# Altium PCB OptoGrid_uLEDArray_V0.05.pcbdoc (part 1 of 2)
Units mil, origin at the board's own origin, x right, y up, seen from the top; angles counter-clockwise.
Board outline 861.98 x 813.48 mil, 2 copper layers (Top Layer, Bottom Layer); 65 components, 16 nets, 148 pads, 64 vias.
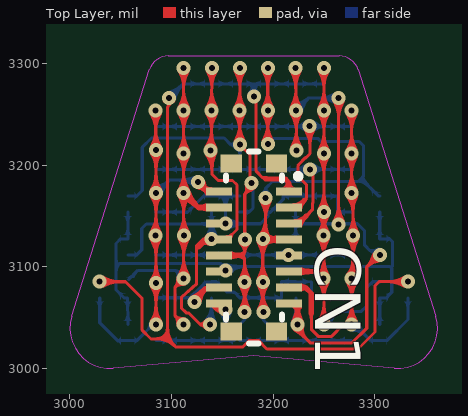
[diagram p0: Top Layer view]
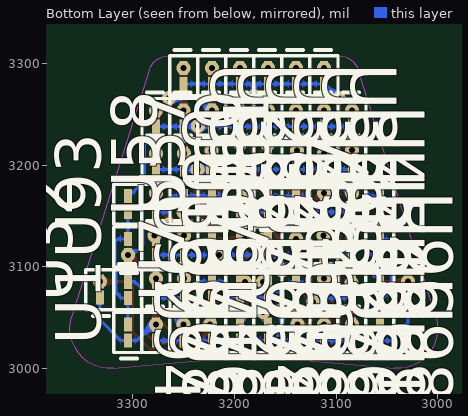
[diagram p1: Bottom Layer view, seen from below]

## Layer stack, top to bottom
Top Layer: signal copper (thickness not stored)
Dielectric: dielectric 12.6, FR-4, Dk 4.8
Bottom Layer: signal copper (thickness not stored)

## Board outline
3611.98,2750 2750,2750 2750,3563.48 3611.98,3563.48

## Design rules (kind name [scope] priority, off if disabled: settings)
BoardOutlineClearance Default [All] p0: genericclearance=10 ignorepadtopadclearanceinfootprint=FALSE except(0: Region-CutoutEdge Arc-SplitContinuation Track-SplitContinuation SMDPad-SplitContinuation THPad-SplitContinuation Via-SplitContinuation Fill-SplitContinuation Poly-SplitContinuation Region-SplitContinuation Text-SplitContinuation; 3: Track-OutlineEdge SMDPad-OutlineEdge THPad-OutlineEdge Via-OutlineEdge Fill-OutlineEdge Region-OutlineEdge Poly-OutlineEdge Text-OutlineEdge Track-CutoutEdge SMDPad-CutoutEdge THPad-CutoutEdge Via-CutoutEdge Fill-CutoutEdge)
Clearance Default [(InNet('Y6') OR InNet('X3') OR InNet('X4') OR InNet('X8') OR InNet('X1') OR InNet('Y3') OR InNet('Y1') OR InNet('Y5') OR InNet('Y7') OR InNet('Y8') OR InNet('X7') OR InNet('X2') OR InNet('Y2') OR InNet('Y4') OR InNet('X6') OR InNet('X5'))] p1: gap=7 ignorepadtopadclearanceinfootprint=FALSE except(0: Region-Region; 3: Track-Track Track-SMDPad SMDPad-SMDPad Track-THPad SMDPad-THPad THPad-THPad Track-Via SMDPad-Via THPad-Via Via-Via Track-Fill SMDPad-Fill THPad-Fill Via-Fill Fill-Fill Track-Region SMDPad-Region THPad-Region Via-Region Fill-Region Track-Poly SMDPad-Poly THPad-Poly Via-Poly Fill-Poly Region-Poly Poly-Poly Track-Text SMDPad-Text THPad-Text Via-Text Fill-Text Region-Text Poly-Text Text-Text Track-Sheet SMDPad-Sheet THPad-Sheet Via-Sheet Fill-Sheet Region-Sheet Poly-Sheet Text-Sheet Track-Hole SMDPad-Hole THPad-Hole Via-Hole Fill-Hole Region-Hole Poly-Hole Text-Hole Sheet-Hole)
DiffPairsRouting differentialPair [All] p1: maxuncoupledlength=10 minlimit=6 maxlimit=6 mostfreqgap=6 toplayer_minwidth=5 toplayer_prefwidth=10 toplayer_maxwidth=100 bottomlayer_minwidth=5 bottomlayer_prefwidth=10 bottomlayer_maxwidth=100
PasteMaskExpansion Common [All] p1: expansion=0
PlaneConnect Default [All] p1: planeconnectstyle=Relief reliefexpansion=20 reliefentries=4 reliefconductorwidth=0 reliefairgap=10
PolygonConnect Default [All] p1: connectstyle=Relief reliefentries=4 reliefconductorwidth=0 polygonreliefangle="90 Angle" airgapwidth=10
RoutingVias Default [All] p1: viastyle="Through Hole" holewidth=5.9 minholewidth=5.9 maxholewidth=2362 width=13.8 minwidth=13.8 maxwidth=3938
SolderMaskExpansion Common [All] p1: useseparateexpansions=TRUE expansion=2 expansionbottom=2
Width Default [All] p1: maxlimit=1000 minlimit=3 preferedwidth=5

## Components (designator, comment, footprint, x,y, rotation, side; value= is the part's Value field where it differs from the comment)
CN1 "YXT-BB10-16P-02" CONN-SMD_YXT-BB10-16P-02 3180.97,3118.89 r270 top locked
U1 "BLUE LED" BLUE_LED_KINGBRIGHT_0201 3304.97,3035.09 r90 bottom locked
U29 "BLUE LED" BLUE_LED_KINGBRIGHT_0201 3194.75,3287.89 r270 bottom locked
U30 "BLUE LED" BLUE_LED_KINGBRIGHT_0201 3222.23,3287.89 r270 bottom locked
U31 "BLUE LED" BLUE_LED_KINGBRIGHT_0201 3249.97,3287.89 r270 bottom locked
U32 "BLUE LED" BLUE_LED_KINGBRIGHT_0201 3332.57,3077.29 r90 bottom locked
U33 "BLUE LED" BLUE_LED_KINGBRIGHT_0201 3167.19,3287.89 r270 bottom locked
U34 "BLUE LED" BLUE_LED_KINGBRIGHT_0201 3139.64,3287.89 r270 bottom locked
U35 "BLUE LED" BLUE_LED_KINGBRIGHT_0201 3111.97,3287.89 r270 bottom locked
U36 "BLUE LED" BLUE_LED_KINGBRIGHT_0201 3029.37,3077.29 r90 bottom locked
U38 "BLUE LED" BLUE_LED_KINGBRIGHT_0201 3194.77,3245.89 r270 bottom locked
U39 "BLUE LED" BLUE_LED_KINGBRIGHT_0201 3222.37,3245.89 r270 bottom locked
U40 "BLUE LED" BLUE_LED_KINGBRIGHT_0201 3249.97,3245.89 r270 bottom locked
U41 "BLUE LED" BLUE_LED_KINGBRIGHT_0201 3277.37,3245.89 r270 bottom locked
U42 "BLUE LED" BLUE_LED_KINGBRIGHT_0201 3166.97,3245.89 r270 bottom locked
U43 "BLUE LED" BLUE_LED_KINGBRIGHT_0201 3139.47,3245.89 r270 bottom locked
U44 "BLUE LED" BLUE_LED_KINGBRIGHT_0201 3111.97,3245.89 r270 bottom locked
U45 "BLUE LED" BLUE_LED_KINGBRIGHT_0201 3084.47,3245.89 r270 bottom locked
U47 "BLUE LED" BLUE_LED_KINGBRIGHT_0201 3194.46,3203.68 r270 bottom locked
U48 "BLUE LED" BLUE_LED_KINGBRIGHT_0201 3223.98,3203.52 r270 bottom locked
U49 "BLUE LED" BLUE_LED_KINGBRIGHT_0201 3249.86,3203.68 r270 bottom locked
U50 "BLUE LED" BLUE_LED_KINGBRIGHT_0201 3277.37,3203.69 r270 bottom locked
U51 "BLUE LED" BLUE_LED_KINGBRIGHT_0201 3167.17,3203.69 r270 bottom locked
U52 "BLUE LED" BLUE_LED_KINGBRIGHT_0201 3139.46,3203.68 r270 bottom locked
U53 "BLUE LED" BLUE_LED_KINGBRIGHT_0201 3111.97,3203.69 r270 bottom locked
U54 "BLUE LED" BLUE_LED_KINGBRIGHT_0201 3084.57,3203.69 r270 bottom locked
U56 "BLUE LED" BLUE_LED_KINGBRIGHT_0201 3194.77,3161.49 r270 bottom locked
U57 "BLUE LED" BLUE_LED_KINGBRIGHT_0201 3222.17,3161.69 r90 bottom locked
U58 "BLUE LED" BLUE_LED_KINGBRIGHT_0201 3249.77,3161.49 r90 bottom locked
U59 "BLUE LED" BLUE_LED_KINGBRIGHT_0201 3277.37,3161.49 r270 bottom locked
U60 "BLUE LED" BLUE_LED_KINGBRIGHT_0201 3167.17,3161.49 r90 bottom locked
U61 "BLUE LED" BLUE_LED_KINGBRIGHT_0201 3139.57,3161.49 r90 bottom locked
U62 "BLUE LED" BLUE_LED_KINGBRIGHT_0201 3111.97,3161.49 r270 bottom locked
U63 "BLUE LED" BLUE_LED_KINGBRIGHT_0201 3084.46,3161.68 r270 bottom locked
U66 "BLUE LED" BLUE_LED_KINGBRIGHT_0201 3084.37,3119.42 r270 bottom locked
U67 "BLUE LED" BLUE_LED_KINGBRIGHT_0201 3112.17,3119.49 r270 bottom locked
U68 "BLUE LED" BLUE_LED_KINGBRIGHT_0201 3139.57,3119.49 r270 bottom locked
U69 "BLUE LED" BLUE_LED_KINGBRIGHT_0201 3167.17,3119.29 r270 bottom locked
U70 "BLUE LED" BLUE_LED_KINGBRIGHT_0201 3277.37,3119.49 r270 bottom locked
U71 "BLUE LED" BLUE_LED_KINGBRIGHT_0201 3249.77,3119.49 r270 bottom locked
U72 "BLUE LED" BLUE_LED_KINGBRIGHT_0201 3222.17,3119.49 r270 bottom locked
U73 "BLUE LED" BLUE_LED_KINGBRIGHT_0201 3194.77,3119.49 r270 bottom locked
U74 "BLUE LED" BLUE_LED_KINGBRIGHT_0201 3194.77,3077.29 r270 bottom locked
U75 "BLUE LED" BLUE_LED_KINGBRIGHT_0201 3222.37,3077.29 r90 bottom locked
U76 "BLUE LED" BLUE_LED_KINGBRIGHT_0201 3249.77,3077.29 r270 bottom locked
U77 "BLUE LED" BLUE_LED_KINGBRIGHT_0201 3277.37,3077.29 r270 bottom locked
U78 "BLUE LED" BLUE_LED_KINGBRIGHT_0201 3167.17,3077.29 r270 bottom locked
U79 "BLUE LED" BLUE_LED_KINGBRIGHT_0201 3139.57,3077.29 r90 bottom locked
U80 "BLUE LED" BLUE_LED_KINGBRIGHT_0201 3111.97,3077.29 r270 bottom locked
U81 "BLUE LED" BLUE_LED_KINGBRIGHT_0201 3084.57,3077.29 r270 bottom locked
U83 "BLUE LED" BLUE_LED_KINGBRIGHT_0201 3194.77,3035.29 r270 bottom locked
U84 "BLUE LED" BLUE_LED_KINGBRIGHT_0201 3222.17,3035.29 r270 bottom locked
U85 "BLUE LED" BLUE_LED_KINGBRIGHT_0201 3249.97,3035.29 r270 bottom locked
U86 "BLUE LED" BLUE_LED_KINGBRIGHT_0201 3277.37,3035.29 r270 bottom locked
U87 "BLUE LED" BLUE_LED_KINGBRIGHT_0201 3167.17,3035.29 r270 bottom locked
U88 "BLUE LED" BLUE_LED_KINGBRIGHT_0201 3139.57,3035.29 r270 bottom locked
U89 "BLUE LED" BLUE_LED_KINGBRIGHT_0201 3111.97,3035.29 r270 bottom locked
U90 "BLUE LED" BLUE_LED_KINGBRIGHT_0201 3084.57,3035.29 r270 bottom locked
U92 "BLUE LED" BLUE_LED_KINGBRIGHT_0201 3304.97,3161.49 r270 bottom locked
U93 "BLUE LED" BLUE_LED_KINGBRIGHT_0201 3304.97,3119.49 r90 bottom locked
U94 "BLUE LED" BLUE_LED_KINGBRIGHT_0201 3304.97,3077.29 r270 bottom locked
U96 "BLUE LED" BLUE_LED_KINGBRIGHT_0201 3056.97,3161.49 r270 bottom locked
U97 "BLUE LED" BLUE_LED_KINGBRIGHT_0201 3056.97,3119.49 r90 bottom locked
U98 "BLUE LED" BLUE_LED_KINGBRIGHT_0201 3056.77,3077.29 r270 bottom locked
U99 "BLUE LED" BLUE_LED_KINGBRIGHT_0201 3056.97,3035.09 r90 bottom locked

## Footprints (in the part's own frame and the unit in brackets; to place one, negate y for a bottom-side part, rotate by r counter-clockwise, add the part's x,y. Pads: shape width x height; smd on the part's side, far side on the other; paste and mask are expansions set on the pad)
BLUE_LED_KINGBRIGHT_0201 [mm]
  rect 0.35x0.2 smd: 1(-0.2,0) 2(0.2,0)
  silkscreen extent -0.65,-0.35 0.5,0.35
CONN-SMD_YXT-BB10-16P-02 [mm]
  rect 0.2x0.65 smd: 1(-1.4,0.875) 2(-1.4,-0.875) 3(-1,0.875) 4(-1,-0.875) 5(-0.6,0.875) 6(-0.6,-0.875) 7(-0.2,0.875) 8(-0.2,-0.875) 9(0.2,0.875) 10(0.2,-0.875) 11(0.6,0.875) 12(0.6,-0.875) 13(1,0.875) 14(1,-0.875) 15(1.4,0.875) 16(1.4,-0.875)
  rect 0.45x0.53 smd: 17(-2.095,0.565) 18(-2.095,-0.565) 19(2.095,0.565) 20(2.095,-0.565)
  silkscreen extent -2.4,-0.7 2.4,1.17

## Via types
v1: diameter 13.78, hole 5.91, Top Layer to Bottom Layer, 64 vias

## Nets (pads, with @x,y where several pads share a name; then routed paths per layer and width w, separated by ;. In a path a pad name is that pad's centre, name@x,y a point inside that pad or via, vN(x,y) a via of type N, cw(c..) or ccw(c..) an arc to the next point about the centre after c; other vN are vias at no path point)
X1: CN1.2 U36.1 U45.1 U54.1 U63.1 U66.1 U81.1 U90.1 U99.1 | length 383.9
  Top Layer w3: v1(3084.47,3253.76) 3084.49,3214.69 3084.73,3214.45 v1(3084.75,3083.74) 3084.73,3043.34 v1(3084.57,3043.16)
  Top Layer w5: v1(3126.16,3183.15) 3135.31,3174 CN1.2@3146.52,3174
  Bottom Layer w3: U36.1@3029.37,3069.42 3029.37,3044.69 3046.97,3027.09 U99.1@3056.97,3027.22 3065.9,3027.22 3081.84,3043.16 v1(3084.57,3043.16) ; U66.1@3084.37,3127.29 v1(3084.37,3130.49) ; U63.1@3084.37,3172.69 U63.1@3084.47,3169.59 ; U81.1@3084.57,3085.16 3084.75,3084.98 v1(3084.75,3083.74) ; v1(3084.57,3172.69) 3098.05,3185.21 3124.1,3185.21 v1(3126.16,3183.15)
  other v1: 3084.57,3214.69
X2: CN1.4 U35.1 U44.1 U53.1 U62.1 U67.1 U80.1 U89.1 U98.1 | length 370.8
  Top Layer w3: v1(3111.97,3043.16) 3103.37,3051.79 3103.37,3079.69 v1(3111.97,3088.29) v1(3111.97,3172.49) v1(3111.97,3211.56) v1(3111.97,3253.76) v1(3111.97,3295.76)
  Top Layer w5: v1(3111.97,3172.49) 3126.2,3158.26 CN1.4@3146.52,3158.26
  Bottom Layer w3: U98.1@3057.91,3087.45 3066.86,3096.41 3104.11,3096.41 U80.1@3112.19,3088.33 ; U62.1@3111.77,3172.49 U62.1@3111.97,3169.36 ; U80.1@3111.97,3085.16 v1(3111.97,3088.29) ; U67.1@3112.17,3127.36 v1(3112.17,3130.49)
X3: CN1.8 U34.1 U43.1 U52.1 U61.1 U68.1 U79.1 U88.1 U97.1 | length 490.8
  Top Layer w3: v1(3137.92,3043.09) 3128.15,3043.09 3116.69,3054.55 3114.42,3054.55 3109.91,3059.06 3109.91,3069.98 3124.77,3083.22 3124.77,3120.89 3130.64,3126.76 3139.47,3126.76 CN1.8@3146.52,3126.76 ; v1(3138.4,3214.24) 3138.4,3214.06 3139.37,3213.09 v1(3139.47,3253.76) v1@3139.67,3295.79 ; v1@3139.87,3209.72 3139.87,3190.98 3146,3184.85 3160.11,3184.85 3164.41,3180.55 3164.41,3136.55 CN1.8@3155.98,3128.12
  Top Layer w5: 3126.17,3119.22 3126.62,3119.22 3130.75,3123.34 ; 3130.75,3124.24 3136.95,3124.24 CN1.8@3139.47,3126.76
  Bottom Layer w3: U97.1@3056.97,3111.62 3065.77,3111.62 3070.7,3116.54 3070.7,3137.55 3075.22,3142.08 3138.16,3142.08 3138.43,3142.35 ; v1(3137.92,3043.09) 3139.57,3044.74 U79.1@3139.57,3069.42 ; v1(3139.57,3127.36) U61.1@3139.57,3153.62
  other v1: 3139.63,3295.76
X4: CN1.10 U33.1 U42.1 U51.1 U60.1 U69.1 U78.1 U87.1 U96.1 | length 508.6
  Top Layer w3: CN1.10@3146.52,3111.01 3157.22,3111.01 3168.57,3111.01 3168.77,3111.01 ; v1(3167.19,3295.76) 3167.29,3295.67 v1(3167.29,3220.12) 3177.34,3210.07 3177.34,3183.86 v1(3178.7,3182.5) 3178.7,3178.01 3172.11,3171.42 v1(3172.11,3126.86) 3172.11,3114.34 3168.77,3111.01 ; v1(3172.05,3055.16) v1(3171.99,3084.83) 3171.99,3107.8 3168.77,3111.01
  Top Layer w5: CN1.10@3157.22,3111.01 3168.53,3111.05
  Bottom Layer w3: U96.1@3056.97,3169.36 3065.62,3169.39 3071.2,3174.97 3071.2,3217.42 3080.4,3226.62 3151.84,3226.62 3158.34,3220.12 v1(3167.29,3220.12) 3167.29,3211.68 U51.1@3167.17,3211.56 ; U87.1@3167.17,3043.16 3172.05,3048.04 v1(3172.05,3055.16) ; U60.1@3167.17,3153.62 3176.1,3153.62 3180.12,3157.64 3180.12,3181.08 v1(3178.7,3182.5)
  other v1: 3166.97,3253.76
X5: CN1.7 U29.1 U38.1 U47.1 U56.1 U73.1 U74.1 U83.1 U92.1 | length 497
  Top Layer w3: v1@3189.82,3126.48 v1(3189.82,3085.11) 3189.82,3055.76 v1(3190.42,3055.16) ; v1(3189.94,3127.29) 3192.73,3130.08 v1(3192.73,3167.44) ; v1(3194.73,3220.66) 3194.73,3253.76 v1@3194.73,3295.75
  Top Layer w5: v1@3188.44,3126.73 3188.7,3126.48 3189.82,3126.48 CN1.7@3214.88,3126.48
  Bottom Layer w3: v1(3190.42,3055.16) 3190.42,3047.55 U83.1@3194.77,3043.16 ; U56.1@3194.77,3169.36 3192.86,3167.44 v1(3192.73,3167.44) 3192.73,3177.24 3199.36,3183.88 3283.76,3183.88 3286.55,3186.67 ; v1(3194.73,3220.66) 3200.36,3226.29 3243.97,3226.29 3246.97,3223.29 3284.71,3223.29 3288.77,3219.23 3288.77,3188.89 3286.55,3186.67 ; U92.1@3304.97,3169.36 3303.86,3169.36 3286.55,3186.67
  other v1: 3194.77,3253.76 3194.75,3295.76
X6: CN1.15 U30.1 U39.1 U48.1 U57.1 U72.1 U75.1 U84.1 U93.1 | length 615.1
  Top Layer w3: v1@3222.27,3295.79 v1(3222.37,3253.76) ; v1(3222.37,3253.76) 3222.84,3253.29 v1(3222.84,3214.38) ; v1(3224.02,3043.09) 3224.02,3037.44 3236.44,3025.02 3277.69,3025.02 3292.17,3039.39 3292.17,3099.89 3303.87,3111.59 v1(3304.97,3111.62) ; v1@3224.02,3044.15 3224.02,3058.19 3224.02,3058.44 ; v1(3264.37,3265.89) 3264.57,3265.69 v1(3264.57,3141.49)
  Top Layer w5: CN1.15@3215.41,3063.77 3218.69,3063.77 3224.02,3058.44 ; v1@3224.02,3044.15 3224.01,3058.17 ; 3224.02,3058.19 CN1.15@3225.71,3059.87
  Bottom Layer w3: U72.1@3222.17,3127.36 3222.17,3141.49 ; U57.1@3222.17,3153.82 3222.17,3141.49 ; U75.1@3222.37,3069.42 3222.37,3044.74 v1(3224.02,3043.09) ; v1(3222.37,3253.76) 3234.5,3265.89 v1(3264.37,3265.89) ; v1(3304.97,3111.62) 3301.13,3115.46 3295.72,3115.46 3290.16,3121.01 3290.16,3135.21 3283.14,3142.23 3222.91,3142.23 3222.17,3141.49
  other v1: 3222.23,3295.76
X7: CN1.11 U31.1 U40.1 U49.1 U58.1 U71.1 U76.1 U85.1 U94.1 | length 378.9
  Top Layer w3: v1(3249.97,3043.16) v1(3249.97,3153.62) v1(3249.97,3253.76) v1(3249.97,3295.76)
  Top Layer w5: CN1.11@3215.41,3095.27 3242.79,3095.27 v1(3249.77,3088.29)
  Bottom Layer w3: U76.1@3249.77,3085.16 v1(3249.77,3088.29) ; U71.1@3249.77,3127.36 v1(3249.77,3130.49) ; v1(3249.97,3043.16) 3262.9,3056.09 3286.77,3056.09 3291.97,3061.29 3291.97,3079.09 3298.04,3085.16 U94.1@3304.97,3085.16
  other v1: 3249.86,3211.55
X8: CN1.13 U1.1 U32.1 U41.1 U50.1 U59.1 U70.1 U77.1 U86.1 | length 421.6
  Top Layer w3: 3237.57,3054.18 3237.57,3038.29 3244.37,3031.49 3257.67,3031.49 3269.37,3043.19 v1(3277.37,3043.16) v1(3277.37,3088.29) 3278.77,3089.69 v1(3278.77,3130.49) 3278.77,3171.09 v1(3277.37,3172.49) v1(3277.37,3211.56) v1(3277.37,3253.76)
  Top Layer w5: CN1.13@3215.41,3079.52 3231.82,3079.52 3237.57,3073.77 ; 3237.57,3054.18 3237.57,3073.34
  Bottom Layer w3: v1(3277.37,3043.16) 3280.3,3043.16 3296.24,3027.22 U1.1@3304.97,3027.22 3311.87,3027.19 3332.77,3048.09 U32.1@3332.57,3069.42 ; U77.1@3277.37,3085.16 v1(3277.37,3088.29) ; U59.1@3277.37,3169.36 v1(3277.37,3172.49) ; U70.1@3278.77,3125.91 v1(3278.77,3130.49)
Y1: CN1.1 U29.2 U30.2 U31.2 U32.2 U33.2 U34.2 U35.2 U36.2 | length 940
  Top Layer w3: v1(3029.37,3085.17) 3054.69,3085.17 3071.17,3068.69 3071.17,3037.49 3079.77,3028.89 3096.17,3028.89 ; v1(3097.57,3265.89) 3097.57,3258.77 3096.17,3257.37 3096.17,3028.89 ; v1(3180.97,3267.29) 3183.34,3267.29 3183.34,3193.97 3189.94,3187.37 3193.07,3187.37 3194.06,3186.38 3194.57,3185.87 ; v1(3332.57,3085.17) 3304.27,3085.19 3300.37,3081.29 3300.37,3035.69 3283.59,3018.91 3193.83,3018.91 3185.64,3027.49 3176.76,3027.49 3170.16,3020.89 3104.17,3020.89 3096.17,3028.89
  Top Layer w5: 3192.36,3186.38 3194.06,3186.38 3212.02,3186.38 3214.65,3183.33 ; CN1.1@3215.18,3174.02 3215.18,3182.8
  Bottom Layer w3: v1(3097.57,3265.89) 3111.69,3280.01 U34.2@3139.64,3280.01 U33.2@3167.19,3280.01 3180.97,3280.01 ; v1(3180.97,3267.29) 3180.97,3280.01 ; U31.2@3249.97,3280.01 U30.2@3222.23,3280.01 U29.2@3194.75,3280.01 3180.97,3280.01
Y2: CN1.3 U38.2 U39.2 U40.2 U41.2 U42.2 U43.2 U44.2 U45.2 | length 284.9
  Top Layer w3: 3230.47,3164.99 3232.97,3167.49 3232.97,3180.46 3224.37,3189.06 3224.37,3199.29 3225.09,3200.01 3225.09,3200.53 3231.77,3207.2 3232.28,3207.2 3236.26,3211.18 3236.26,3238.2 v1(3235.97,3238.49)
  Top Layer w5: CN1.3@3224.47,3159.25 CN1.3@3225.17,3159.25 ; CN1.3@3224.95,3159.47 3230.47,3164.99
  Bottom Layer w3: U45.2@3084.47,3238.01 U44.2@3111.97,3238.01 U43.2@3139.47,3238.01 U42.2@3166.97,3238.01 U38.2@3194.77,3238.01 U39.2@3222.37,3238.01 U40.2@3249.97,3238.01 U41.2@3277.37,3238.01
Y3: CN1.5 U47.2 U48.2 U49.2 U50.2 U51.2 U52.2 U53.2 U54.2 | length 262.8
  Top Layer w3: 3232.39,3149.71 3238.58,3155.9 3238.58,3162.27 3239.17,3162.86 3239.17,3193.11 v1(3236.48,3195.81)
  Top Layer w5: CN1.5@3215.41,3142.51 3225.19,3142.51 3232.39,3149.71
  Bottom Layer w3: U54.2@3084.57,3195.81 U53.2@3111.97,3195.81 U52.2@3139.46,3195.8 U51.2@3167.17,3195.81 U47.2@3194.46,3195.8 3222.26,3195.81 v1(3236.48,3195.81) U49.2@3249.86,3195.8 U50.2@3277.37,3195.81
Y4: CN1.6 U56.2 U57.2 U58.2 U59.2 U60.2 U61.2 U62.2 U63.2 | length 272.9
  Bottom Layer w3: U63.2@3084.46,3153.8 U62.2@3111.97,3153.61 3115.67,3153.59 3131.47,3169.39 U61.2@3139.57,3169.37 ; U61.2@3139.57,3169.37 3153.57,3169.37 ; v1@3153.37,3143.49 v1@3153.02,3143.14 ; U60.2@3167.17,3169.37 3153.57,3169.37 ; U59.2@3277.37,3153.61 3263.37,3153.69 3263.37,3169.39 U58.2@3249.77,3169.37 U57.2@3222.17,3169.57 3209.97,3169.69 3209.97,3166.29 3197.27,3153.59 U56.2@3194.77,3153.61 3194.77,3149.49 3187.53,3142.25 v1(3153.02,3142.25) v1@3153.02,3143.14 ; v1@3153.02,3143.14 3153.02,3168.82 3153.57,3169.37
Y5: CN1.9 U66.2 U67.2 U68.2 U69.2 U70.2 U71.2 U72.2 U73.2 | length 193
  Bottom Layer w3: U66.2@3084.37,3111.54 3139.57,3111.52 3194.77,3111.55 3215.17,3111.56 U72.2@3222.17,3111.61 U71.2@3249.77,3111.61 U70.2@3277.37,3111.61
  other v1: 3215.17,3111.49
Y6: CN1.14 U74.2 U75.2 U76.2 U77.2 U78.2 U79.2 U80.2 U81.2 | length 261
  Top Layer w3: v1(3122.79,3065.13) v1@3125.37,3067.71
  Top Layer w5: v1@3124.89,3068.19 3124.89,3069.91 3133.49,3078.51
  Bottom Layer w3: U81.2@3084.57,3069.41 U80.2@3111.97,3069.41 v1@3118.49,3069.41 ; v1(3122.79,3065.13) v1@3118.51,3069.41 ; U77.2@3277.37,3069.41 U76.2@3249.77,3069.41 3237.57,3069.39 3237.57,3085.09 U75.2@3222.37,3085.17 3208.17,3085.29 3208.17,3069.39 U74.2@3194.77,3069.41 U78.2@3167.17,3069.41 3161.49,3075.09 3154.37,3075.09 3144.29,3085.17 U79.2@3139.57,3085.17 3139.1,3084.69 3133.78,3084.69 v1@3118.49,3069.41
Y7: CN1.16 U83.2 U84.2 U85.2 U86.2 U87.2 U88.2 U89.2 U90.2 | length 235.1
  Top Layer w5: CN1.16@3141.63,3061.31 3145.11,3057.82 v1@3153.24,3057.82
  Bottom Layer w3: U90.2@3084.57,3027.41 U89.2@3111.97,3027.41 U88.2@3139.57,3027.41 3162.16,3027.41 3153.26,3035.86 v1(3153.26,3057.87) ; U87.2@3167.17,3027.41 U83.2@3194.77,3027.41 U84.2@3222.17,3027.41 U85.2@3249.97,3027.41 U86.2@3277.37,3027.41
Y8: CN1.12 U1.2 U92.2 U93.2 U94.2 U96.2 U97.2 U98.2 U99.2 | length 535.2
  Bottom Layer w3: U98.2@3055.97,3069.39 3053.27,3069.39 3045.37,3077.29 3045.37,3099.72 ; U98.2@3056.77,3069.41 U99.2@3056.97,3042.97 ; U96.2@3056.97,3153.61 U97.2@3056.97,3127.37 3049.88,3127.39 3045.33,3122.84 3045.37,3099.72 ; v1@3153.77,3095.29 3153.37,3095.69 v1(3153.37,3096.18) ; U1.2@3304.97,3042.97 U94.2@3304.97,3069.41 ; U93.2@3304.97,3127.37 U92.2@3304.97,3153.61 ; U94.2@3305.37,3069.39 3311.65,3069.39 3316.79,3074.53 3316.79,3098.27 3315.97,3099.09 ; U93.2@3305.37,3127.39 3314.6,3127.39 3317.72,3124.27 3317.72,3100.84 3315.97,3099.09 ; 3045.37,3099.71 3048.77,3103.11 3148.26,3103.11 3153.37,3097.99 v1(3153.37,3096.18) ; v1(3153.37,3096.18) 3157.3,3100.1 3314.96,3100.1 3315.97,3099.09
pads on no net: CN1.17 CN1.18 CN1.19 CN1.20

## Keep-outs
Board Outline Layer:
  lines w0.98: 3001.85,3051.2 ccw(c3039.4,3039.37) 3042.83,3000.15 3181,3012.24 3319.17,3000.15 ccw(c3322.61,3039.37) 3360.16,3051.2 3283.76,3293.75 ccw(c3264.99,3287.84) 3264.99,3307.52 3097.01,3307.52 ccw(c3097.01,3287.84) 3078.24,3293.75 3001.85,3051.2

## Other copper
Top Layer:
  region net X8: 3231.82,3082.02 3231.82,3077.02 ccw(c3231.82,3071.76) 3228.21,3075.58 3228.21,3083.46 ccw(c3231.82,3087.28)
  region net X7: 3235.71,3097.77 3235.71,3092.77 ccw(c3235.71,3072.48) 3228.21,3091.33 3228.21,3099.21 ccw(c3235.71,3118.06)
  region net X4: 3163.82,3112.51 3163.82,3109.51 ccw(c3163.82,3103.88) 3159.32,3107.26 3159.32,3114.76 ccw(c3163.82,3118.13)
  region net X4: 3166.82,3113.55 3166.81,3108.55 ccw(c3166.89,3088.36) 3159.32,3107.07 3159.32,3114.95 ccw(c3166.75,3133.94)
  region net X3: 3130.64,3125.26 3130.64,3128.26 ccw(c3130.64,3131.5) 3133.73,3130.51 3133.73,3123.01 ccw(c3130.64,3122.02)
  region net X3: 3158.03,3132.29 3160.91,3130.93 ccw(c3167.27,3126.15) 3159.32,3126.15 3153.25,3130.7 ccw(c3153.26,3138.65)
  region net X3: 3130.75,3121.74 3130.75,3126.74 ccw(c3129.88,3130.49) 3133.73,3130.49 3133.73,3122.82 ccw(c3133.73,3118.18)
  region net X5: 3195.12,3123.98 3195.12,3128.98 ccw(c3195.12,3146.18) 3202.62,3130.7 3202.62,3122.82 ccw(c3195.12,3099.01)
  region net Y3: 3228.25,3149.1 3231.8,3145.58 ccw(c3240.89,3136.5) 3228.21,3138.57 3220.29,3146.45 ccw(c3220.29,3159.71)
  region net X2: 3126.23,3155.76 3126.23,3160.76 ccw(c3126.23,3181.05) 3133.73,3162.2 3133.73,3154.32 ccw(c3126.23,3135.47)
  region net Y2: 3226.8,3164.85 3231.08,3162.06 ccw(c3240.07,3154.32) 3228.21,3154.32 3218.84,3162.2 ccw(c3218.84,3175.46)
  region net X1: 3129.42,3176.36 3132.26,3180.59 ccw(c3140.21,3191.2) 3140.21,3177.94 3133.73,3170.06 ccw(c3114.73,3161.67)
  region net Y1: 3212.68,3182.8 3217.68,3182.8 ccw(c3222.69,3182.8) 3221.43,3177.95 3208.93,3177.95 ccw(c3207.67,3182.8)
  region net X2: 3113.47,3278.62 3110.47,3278.62 3110.37,3280.37 3110.09,3282.15 3109.06,3285.73 3107.62,3289.19 3105.96,3292.4 3117.99,3292.4 3116.33,3289.19 3114.88,3285.73 3113.86,3282.15 3113.57,3280.37
  region net X2: 3113.47,3236.62 3110.47,3236.62 3110.37,3238.37 3110.09,3240.15 3109.06,3243.73 3107.62,3247.19 3105.96,3250.4 3117.99,3250.4 3116.33,3247.19 3114.88,3243.73 3113.86,3240.15 3113.57,3238.37
  region net X2: 3110.47,3270.9 3113.47,3270.9 3113.57,3269.15 3113.86,3267.37 3114.88,3263.79 3116.33,3260.33 3117.99,3257.12 3105.96,3257.12 3107.62,3260.33 3109.06,3263.79 3110.09,3267.37 3110.37,3269.15
  region net X2: 3110.47,3228.7 3113.47,3228.7 3113.57,3226.95 3113.86,3225.17 3114.88,3221.59 3116.33,3218.13 3117.99,3214.92 3105.96,3214.92 3107.62,3218.13 3109.06,3221.59 3110.09,3225.17 3110.37,3226.95
  region net X2: 3113.47,3194.42 3110.47,3194.42 3110.37,3196.17 3110.09,3197.95 3109.06,3201.53 3107.62,3204.99 3105.96,3208.2 3117.99,3208.2 3116.33,3204.99 3114.88,3201.53 3113.86,3197.95 3113.57,3196.17
  region net X2: 3110.47,3189.63 3113.47,3189.63 3113.57,3187.88 3113.86,3186.1 3114.88,3182.52 3116.33,3179.06 3117.99,3175.85 3105.96,3175.85 3107.62,3179.06 3109.06,3182.52 3110.09,3186.1 3110.37,3187.88
  region net X2: 3125.76,3162.24 3122.22,3158.71 3119.67,3160.82 3116.43,3162.9 3113.02,3164.69 3109.93,3165.91 3118.55,3174.53 3119.78,3171.44 3121.56,3168.03 3123.64,3164.8
  region net X2: 3113.47,3155.35 3110.47,3155.35 3110.37,3157.1 3110.09,3158.88 3109.06,3162.46 3107.62,3165.92 3105.96,3169.13 3117.99,3169.13 3116.33,3165.92 3114.88,3162.46 3113.86,3158.88 3113.57,3157.1
  region net X2: 3110.47,3147.46 3113.47,3147.81 3113.58,3146.08 3113.87,3144.3 3114.92,3140.68 3116.39,3137.17 3118.09,3134.03 3106.06,3133.68 3107.68,3136.94 3109.1,3140.36 3110.09,3143.89 3110.37,3145.67
  region net X2: 3113.47,3113.17 3110.47,3113.52 3110.37,3115.31 3110.09,3117.09 3109.1,3120.62 3107.68,3124.04 3106.06,3127.3 3118.09,3126.95 3116.39,3123.81 3114.92,3120.3 3113.87,3116.68 3113.58,3114.9
  region net X2: 3104.43,3078.63 3102.31,3080.75 3103.33,3081.91 3103.99,3082.98 3104.38,3083.99 3104.58,3085.02 3104.8,3087.28 3104.99,3088.62 3105.34,3090.16 3113.85,3081.66 3112.3,3081.3 3110.96,3081.12 3108.7,3080.9 3107.68,3080.69 3106.66,3080.31 3105.59,3079.65
  region net X2: 3110.47,3105.43 3113.47,3105.43 3113.57,3103.68 3113.86,3101.9 3114.88,3098.32 3116.33,3094.86 3117.99,3091.65 3105.96,3091.65 3107.62,3094.86 3109.06,3098.32 3110.09,3101.9 3110.37,3103.68
  region net X2: 3102.31,3050.73 3104.43,3052.85 3105.6,3051.83 3106.66,3051.17 3107.68,3050.78 3108.71,3050.57 3110.97,3050.34 3112.32,3050.15 3113.87,3049.78 3105.34,3041.31 3104.99,3042.85 3104.8,3044.19 3104.58,3046.46 3104.38,3047.49 3103.99,3048.51 3103.33,3049.57
  region net X3: 3141.09,3278.65 3138.09,3278.59 3138,3280.34 3137.72,3282.12 3136.71,3285.71 3135.27,3289.19 3133.62,3292.39 3145.65,3292.4 3143.99,3289.19 3142.53,3285.75 3141.49,3282.19 3141.2,3280.41
  region net X3: 3140.93,3236.61 3137.93,3236.62 3137.83,3238.38 3137.55,3240.16 3136.54,3243.74 3135.1,3247.2 3133.45,3250.41 3145.48,3250.38 3143.81,3247.18 3142.36,3243.72 3141.33,3240.15 3141.04,3238.37
  region net X3: 3138.05,3270.91 3141.05,3270.9 3141.15,3269.14 3141.43,3267.36 3142.43,3263.78 3143.86,3260.31 3145.5,3257.09 3133.48,3257.15 3135.15,3260.35 3136.61,3263.81 3137.65,3267.37 3137.95,3269.16
  region net X4: 3168.79,3278.7 3165.79,3278.53 3165.69,3280.27 3165.4,3282.06 3164.36,3285.65 3162.9,3289.14 3161.23,3292.31 3173.25,3292.48 3171.61,3289.25 3170.18,3285.8 3169.17,3282.25 3168.89,3280.47
  region net X4: 3165.79,3271.18 3168.79,3270.62 3168.89,3268.81 3169.16,3267.03 3170.15,3263.54 3171.54,3260.14 3173.14,3256.84 3161.12,3257.39 3162.84,3260.51 3164.33,3264.04 3165.39,3267.68 3165.69,3269.47
  region net X4: 3168.79,3236.9 3165.79,3236.34 3165.69,3238.05 3165.39,3239.84 3164.33,3243.48 3162.84,3247.01 3161.12,3250.12 3173.14,3250.68 3171.54,3247.38 3170.15,3243.98 3169.16,3240.49 3168.89,3238.71
  region net X5: 3196.23,3278.6 3193.23,3278.64 3193.13,3280.4 3192.84,3282.18 3191.82,3285.75 3190.38,3289.21 3188.73,3292.42 3200.76,3292.38 3199.09,3289.18 3197.64,3285.71 3196.62,3282.13 3196.33,3280.35
  region net X5: 3193.23,3270.86 3196.23,3270.94 3196.33,3269.19 3196.62,3267.41 3197.65,3263.83 3199.1,3260.35 3200.77,3257.16 3188.74,3257.08 3190.39,3260.3 3191.83,3263.76 3192.84,3267.32 3193.13,3269.1
  region net X5: 3196.23,3236.58 3193.23,3236.66 3193.13,3238.42 3192.84,3240.2 3191.83,3243.76 3190.39,3247.22 3188.74,3250.44 3200.77,3250.36 3199.1,3247.17 3197.65,3243.69 3196.62,3240.11 3196.33,3238.33
  region net X6: 3223.81,3278.66 3220.81,3278.58 3220.71,3280.33 3220.42,3282.11 3219.38,3285.69 3217.92,3289.16 3216.25,3292.35 3228.27,3292.45 3226.63,3289.23 3225.2,3285.77 3224.19,3282.2 3223.91,3280.42
  region net X6: 3220.83,3270.9 3223.83,3270.91 3223.94,3269.15 3224.23,3267.37 3225.26,3263.8 3226.71,3260.34 3228.38,3257.14 3216.35,3257.11 3218,3260.32 3219.44,3263.78 3220.45,3267.36 3220.74,3269.14
  region net X6: 3224.34,3237.03 3221.34,3236.22 3221.23,3237.91 3220.93,3239.69 3219.86,3243.37 3218.34,3246.92 3216.6,3250 3228.6,3250.81 3227.04,3247.46 3225.67,3244.1 3224.71,3240.65 3224.44,3238.87
  region net X7: 3251.47,3278.62 3248.47,3278.62 3248.37,3280.37 3248.09,3282.15 3247.06,3285.73 3245.62,3289.19 3243.96,3292.4 3255.99,3292.4 3254.33,3289.19 3252.88,3285.73 3251.86,3282.15 3251.57,3280.37
  region net X7: 3248.47,3270.9 3251.47,3270.9 3251.57,3269.15 3251.86,3267.37 3252.88,3263.79 3254.33,3260.33 3255.99,3257.12 3243.96,3257.12 3245.62,3260.33 3247.06,3263.79 3248.09,3267.37 3248.37,3269.15
  region net X7: 3251.47,3236.62 3248.47,3236.62 3248.37,3238.37 3248.09,3240.15 3247.06,3243.73 3245.62,3247.19 3243.96,3250.4 3255.99,3250.4 3254.33,3247.19 3252.88,3243.73 3251.86,3240.15 3251.57,3238.37
  region net X8: 3278.87,3236.62 3275.87,3236.62 3275.77,3238.37 3275.49,3240.15 3274.46,3243.73 3273.02,3247.19 3271.36,3250.4 3283.39,3250.4 3281.73,3247.19 3280.28,3243.73 3279.26,3240.15 3278.97,3238.37
  region net X8: 3275.87,3228.7 3278.87,3228.7 3278.97,3226.95 3279.26,3225.17 3280.28,3221.59 3281.73,3218.13 3283.39,3214.92 3271.36,3214.92 3273.02,3218.13 3274.46,3221.59 3275.49,3225.17 3275.77,3226.95
  region net X8: 3278.87,3194.42 3275.87,3194.42 3275.77,3196.17 3275.49,3197.95 3274.46,3201.53 3273.02,3204.99 3271.36,3208.2 3283.39,3208.2 3281.73,3204.99 3280.28,3201.53 3279.26,3197.95 3278.97,3196.17
  region net X8: 3275.87,3189.63 3278.87,3189.63 3278.97,3187.88 3279.26,3186.1 3280.28,3182.52 3281.73,3179.06 3283.39,3175.85 3271.36,3175.85 3273.02,3179.06 3274.46,3182.52 3275.49,3186.1 3275.77,3187.88
  region net X8: 3280.27,3156.64 3277.27,3154.2 3277.16,3155.8 3276.84,3157.6 3275.69,3161.45 3274.05,3165.12 3273.13,3166.69 3272.17,3167.98 3283.95,3170.42 3282.6,3166.67 3281.42,3163.64 3280.59,3160.56 3280.36,3158.75
  region net X8: 3277.27,3147.63 3280.27,3147.63 3280.37,3145.88 3280.66,3144.1 3281.68,3140.52 3283.13,3137.06 3284.79,3133.85 3272.76,3133.85 3274.42,3137.06 3275.86,3140.52 3276.89,3144.1 3277.17,3145.88
  region net X8: 3280.27,3113.35 3277.27,3113.35 3277.17,3115.1 3276.89,3116.88 3275.86,3120.46 3274.42,3123.92 3272.76,3127.13 3284.79,3127.13 3283.13,3123.92 3281.68,3120.46 3280.66,3116.88 3280.37,3115.1
  region net X8: 3278.87,3071.15 3275.87,3071.15 3275.77,3072.9 3275.49,3074.68 3274.46,3078.26 3273.02,3081.72 3271.36,3084.93 3283.39,3084.93 3281.73,3081.72 3280.28,3078.26 3279.26,3074.68 3278.97,3072.9
  region net X8: 3277.27,3106.58 3280.27,3104.14 3280.36,3102.03 3280.59,3100.22 3281.42,3097.14 3282.6,3094.11 3283.95,3090.36 3272.17,3092.8 3273.13,3094.09 3274.05,3095.66 3275.69,3099.33 3276.84,3103.18 3277.16,3104.98
  region net X8: 3269.37,3041.69 3269.37,3044.69 3270.16,3044.84 3270.8,3045.23 3271.81,3046.52 3272.78,3048.01 3273.35,3048.67 3274.04,3049.19 3273.98,3037.16 3273.31,3037.68 3272.74,3038.35 3271.79,3039.85 3270.78,3041.14 3270.15,3041.54
  region net X8: 3275.87,3060.3 3278.87,3060.3 3278.97,3058.55 3279.26,3056.77 3280.28,3053.19 3281.73,3049.73 3283.39,3046.52 3271.36,3046.52 3273.02,3049.73 3274.46,3053.19 3275.49,3056.77 3275.77,3058.55
  region net X1: 3083.23,3060.44 3086.23,3060.17 3086.33,3058.39 3086.61,3056.61 3087.61,3053.07 3089.03,3049.64 3090.66,3046.39 3078.64,3046.66 3080.32,3049.82 3081.79,3053.31 3082.83,3056.92 3083.12,3058.7
  region net X1: 3086.23,3066.58 3083.23,3066.61 3083.13,3068.37 3082.84,3070.15 3081.82,3073.72 3080.38,3077.18 3078.72,3080.39 3090.75,3080.36 3089.09,3077.16 3087.64,3073.69 3086.62,3070.11 3086.33,3068.33
  region net X1: 3083.23,3100.86 3086.23,3100.9 3086.33,3099.15 3086.62,3097.37 3087.64,3093.79 3089.09,3090.32 3090.75,3087.12 3078.72,3087.08 3080.38,3090.29 3081.82,3093.75 3082.84,3097.32 3083.13,3099.1
  region net X1: 3086.23,3113.66 3083.23,3113.04 3083.12,3114.75 3082.82,3116.53 3081.76,3120.19 3080.26,3123.72 3078.54,3126.82 3090.55,3127.44 3088.96,3124.13 3087.58,3120.74 3086.6,3117.26 3086.32,3115.48
  region net X1: 3083.23,3147.94 3086.23,3147.32 3086.32,3145.5 3086.6,3143.72 3087.58,3140.24 3088.96,3136.85 3090.55,3133.54 3078.54,3134.16 3080.26,3137.26 3081.76,3140.79 3082.82,3144.45 3083.12,3146.23
  region net X1: 3086.23,3155.68 3083.23,3155.41 3083.12,3157.15 3082.83,3158.93 3081.79,3162.54 3080.32,3166.03 3078.64,3169.19 3090.66,3169.46 3089.03,3166.21 3087.61,3162.78 3086.61,3159.24 3086.33,3157.46
  region net X1: 3083.23,3189.97 3086.23,3189.7 3086.33,3187.92 3086.61,3186.14 3087.61,3182.6 3089.03,3179.17 3090.66,3175.92 3078.64,3176.19 3080.32,3179.35 3081.79,3182.84 3082.83,3186.45 3083.12,3188.23
  region net X1: 3085.98,3236.62 3082.98,3236.62 3082.88,3238.37 3082.59,3240.15 3081.57,3243.73 3080.12,3247.19 3078.46,3250.39 3090.49,3250.4 3088.83,3247.19 3087.39,3243.73 3086.37,3240.16 3086.08,3238.37
  region net X7: 3248.47,3060.3 3251.47,3060.3 3251.57,3058.55 3251.86,3056.77 3252.88,3053.19 3254.33,3049.73 3255.99,3046.52 3243.96,3046.52 3245.62,3049.73 3247.06,3053.19 3248.09,3056.77 3248.37,3058.55
  region net X7: 3241.03,3093.5 3244.56,3097.04 3245.19,3096.58 3246.01,3096.2 3248.01,3095.66 3251.81,3094.87 3243.19,3086.25 3242.41,3090.06 3241.86,3092.05 3241.49,3092.87
  region net X7: 3248.47,3105.61 3251.47,3105.26 3251.57,3103.47 3251.85,3101.69 3252.85,3098.16 3254.26,3094.74 3255.88,3091.48 3243.86,3091.83 3245.55,3094.97 3247.03,3098.48 3248.08,3102.1 3248.37,3103.88
  region net X7: 3251.47,3071.32 3248.47,3070.97 3248.37,3072.7 3248.08,3074.48 3247.03,3078.1 3245.55,3081.61 3243.86,3084.75 3255.88,3085.1 3254.26,3081.84 3252.85,3078.42 3251.85,3074.89 3251.57,3073.11
  region net X7: 3248.47,3147.81 3251.47,3147.46 3251.57,3145.67 3251.85,3143.89 3252.85,3140.36 3254.26,3136.94 3255.88,3133.68 3243.86,3134.03 3245.55,3137.17 3247.03,3140.68 3248.08,3144.3 3248.37,3146.08
  region net X7: 3251.47,3113.52 3248.47,3113.17 3248.37,3114.9 3248.08,3116.68 3247.03,3120.3 3245.55,3123.81 3243.86,3126.95 3255.88,3127.3 3254.26,3124.04 3252.85,3120.62 3251.85,3117.09 3251.57,3115.31
  region net X7: 3248.47,3228.79 3251.47,3228.6 3251.57,3226.82 3251.86,3225.04 3252.87,3221.5 3254.29,3218.05 3255.93,3214.82 3243.9,3215.01 3245.58,3218.18 3247.05,3221.67 3248.08,3225.27 3248.37,3227.05
  region net X7: 3251.47,3194.5 3248.47,3194.31 3248.37,3196.05 3248.08,3197.83 3247.05,3201.43 3245.58,3204.92 3243.9,3208.09 3255.93,3208.28 3254.29,3205.05 3252.87,3201.6 3251.86,3198.06 3251.57,3196.28
  region net X1: 3082.98,3231.76 3085.98,3231.9 3086.09,3230.16 3086.38,3228.38 3087.41,3224.79 3088.87,3221.31 3090.55,3218.13 3078.52,3217.98 3080.16,3221.21 3081.59,3224.66 3082.6,3228.21 3082.88,3229.99
  region net X1: 3086.23,3197.68 3083.23,3197.41 3083.12,3199.15 3082.83,3200.93 3081.79,3204.54 3080.32,3208.03 3078.64,3211.19 3090.66,3211.46 3089.03,3208.21 3087.61,3204.78 3086.61,3201.24 3086.33,3199.46
  region net X3: 3137.92,3232.2 3140.92,3230.49 3141,3228.52 3141.25,3226.73 3142.13,3223.46 3143.39,3220.25 3144.84,3216.7 3132.93,3218.43 3133.86,3219.78 3134.76,3221.37 3136.35,3225 3137.49,3228.78 3137.81,3230.57
  region net X3: 3141.37,3198.46 3138.37,3195.89 3138.26,3197.51 3137.94,3199.31 3136.8,3203.16 3135.16,3206.82 3134.22,3208.38 3133.24,3209.67 3145,3212.24 3143.67,3208.44 3142.51,3205.45 3141.68,3202.41 3141.46,3200.61
  region net X6: 3221.34,3231.52 3224.34,3231.52 3224.44,3229.77 3224.73,3227.99 3225.75,3224.41 3227.2,3220.95 3228.85,3217.74 3216.83,3217.74 3218.48,3220.95 3219.93,3224.41 3220.95,3227.99 3221.24,3229.77
  region net X4: 3165.79,3237.26 3168.79,3237.26 3168.89,3235.51 3169.18,3233.72 3170.2,3230.15 3171.65,3226.69 3173.3,3223.48 3161.28,3223.48 3162.93,3226.69 3164.38,3230.15 3165.4,3233.72 3165.69,3235.51
  region net X5: 3193.23,3237.8 3196.23,3237.8 3196.33,3236.05 3196.62,3234.26 3197.64,3230.69 3199.09,3227.23 3200.74,3224.02 3188.72,3224.02 3190.37,3227.23 3191.82,3230.69 3192.84,3234.26 3193.13,3236.05
  region net X3: 3128.15,3041.59 3128.15,3044.59 3129.01,3044.74 3129.84,3045.14 3131.47,3046.42 3133.03,3047.92 3134.56,3049.1 3134.56,3037.08 3133.03,3038.26 3131.47,3039.76 3129.84,3041.04 3129.01,3041.44
  region net X6: 3221.51,3058.17 3226.51,3058.18 3226.82,3055.17 3227.64,3052.07 3228.79,3049.06 3230.12,3046.31 3217.92,3046.29 3219.24,3049.05 3220.39,3052.07 3221.2,3055.17
  region net X6: 3222.52,3058.19 3225.52,3058.19 3225.63,3056.52 3225.91,3054.97 3226.36,3053.51 3226.93,3052.1 3228.38,3049.34 3230.04,3046.45 3218.01,3046.45 3219.67,3049.34 3221.11,3052.1 3221.69,3053.51 3222.14,3054.97 3222.42,3056.52
  region net X6: 3236.39,3027.2 3229.31,3030.03 3227.73,3031.48 3226.31,3032.59 3223.76,3034.24 3221.31,3035.98 3220.02,3037.2 3218.62,3038.82 3230.53,3040.82 3230.1,3038.89 3230.12,3037.03 3230.54,3035.24 3231.3,3033.51 3232.33,3031.85 3233.56,3030.25
  region net X3: 3130.64,3125.26 3130.64,3128.26 3131.4,3128.42 3132.09,3128.84 3133.31,3130.21 3134.47,3131.8 3135.06,3132.51 3135.7,3133.06 3136.75,3121.08 3135.92,3121.56 3135.17,3122.17 3133.78,3123.56 3132.35,3124.75 3131.54,3125.12
  region net X3: 3130.75,3121.74 3130.75,3126.74 3131.27,3126.89 3131.75,3127.31 3132.6,3128.64 3133.34,3130.19 3134.01,3131.42 3139.56,3120.47 3136.93,3120.67 3135.16,3121.11 3133.38,3121.54
  region net Y7: 3145.11,3055.32 3145.11,3060.32 3145.8,3060.44 3146.45,3060.76 3147.64,3061.79 3148.79,3063 3150,3063.95 3150.09,3051.75 3148.86,3052.69 3147.68,3053.87 3146.46,3054.89 3145.81,3055.21
  region net X1: 3137.08,3175.77 3133.54,3172.23 3132.5,3173.16 3131.44,3173.9 3129.19,3174.99 3126.76,3175.79 3124.12,3176.57 3132.74,3185.19 3133.52,3182.54 3134.31,3180.12 3135.41,3177.87 3136.15,3176.8
  region net X4: 3173.61,3114.34 3170.61,3114.34 3170.51,3115.9 3170.22,3117.16 3169.77,3118.21 3169.2,3119.14 3167.75,3121.01 3166.09,3123.49 3178.12,3123.49 3176.46,3121.01 3175.02,3119.14 3174.44,3118.21 3174,3117.16 3173.71,3115.9
  region net Y2: 3237.76,3221.6 3234.76,3221.1 3234.66,3222.81 3234.36,3224.59 3233.31,3228.23 3231.82,3231.75 3230.11,3234.88 3242.12,3235.38 3240.52,3232.09 3239.13,3228.69 3238.14,3225.19 3237.86,3223.41
  region net X4: 3173.17,3170.36 3171.05,3172.49 3171.78,3173.39 3172.26,3174.37 3172.53,3175.4 3172.61,3176.48 3172.41,3178.75 3171.94,3181.14 3183.44,3177.5 3181.87,3176.14 3180.54,3175.2 3178.26,3173.98 3176,3172.74 3174.69,3171.76
  region net X4: 3170.49,3101.97 3173.49,3101.97 3173.59,3100.22 3173.88,3098.43 3174.9,3094.86 3176.34,3091.4 3178,3088.19 3165.97,3088.19 3167.63,3091.4 3169.08,3094.86 3170.1,3098.43 3170.39,3100.22
  region net X4: 3173.49,3067.68 3170.49,3067.68 3170.39,3069.44 3170.1,3071.22 3169.08,3074.8 3167.63,3078.26 3165.97,3081.46 3178,3081.46 3176.34,3078.26 3174.9,3074.8 3173.88,3071.22 3173.59,3069.44
  region net X4: 3170.49,3072.25 3173.49,3072.35 3173.59,3070.61 3173.88,3068.83 3174.91,3065.24 3176.36,3061.76 3178.03,3058.57 3166.01,3058.47 3167.65,3061.69 3169.09,3065.14 3170.1,3068.7 3170.39,3070.48
  region net X5: 3188.32,3102.26 3191.32,3102.26 3191.42,3100.5 3191.71,3098.72 3192.73,3095.15 3194.17,3091.68 3195.83,3088.48 3183.8,3088.48 3185.46,3091.68 3186.91,3095.15 3187.93,3098.72 3188.22,3100.5
  region net X5: 3191.32,3067.97 3188.32,3067.97 3188.22,3069.73 3187.93,3071.51 3186.91,3075.08 3185.46,3078.55 3183.8,3081.75 3195.83,3081.75 3194.17,3078.55 3192.73,3075.08 3191.71,3071.51 3191.42,3069.73
  region net X5: 3194.23,3150.3 3191.23,3150.3 3191.13,3152.05 3190.84,3153.84 3189.82,3157.41 3188.37,3160.87 3186.71,3164.08 3198.74,3164.08 3197.08,3160.87 3195.64,3157.41 3194.62,3153.84 3194.33,3152.05
  region net X5: 3191.32,3110.04 3188.32,3110.25 3188.22,3112.03 3187.94,3113.81 3186.93,3117.35 3185.5,3120.79 3183.87,3124.03 3195.89,3123.82 3194.21,3120.65 3192.75,3117.16 3191.71,3113.56 3191.42,3111.78
  region net X5: 3191.23,3146.57 3194.23,3141.69 3194.31,3139.37 3194.54,3137.56 3195.28,3134.79 3196.13,3132.02 3196.51,3130.22 3196.8,3127.91 3185.78,3132.79 3187.13,3134.02 3188.26,3135.49 3189.2,3137.15 3189.95,3138.96 3190.52,3140.85 3190.92,3142.78 3191.15,3144.71
  region net X5: 3207.62,3128.98 3206.18,3123.98 3202.76,3123.71 3199.18,3123 3195.66,3122 3192.4,3120.86 3193.84,3132.97 3195.21,3132.15 3196.82,3131.39 3200.47,3130.12 3204.25,3129.28
  region net Y6: 3130.4,3078.96 3135.25,3076.74 3133.25,3074.3 3131.49,3071.27 3130.77,3069.65 3130.21,3068.03 3129.84,3066.45 3129.68,3064.96 3118.99,3070.88 3124.98,3074.58 3127.55,3076.4
  region net X5: 3188.32,3071.76 3191.32,3072.81 3191.43,3071.14 3191.73,3069.35 3192.82,3065.64 3194.35,3062.07 3196.12,3059.03 3184.13,3057.98 3185.67,3061.38 3187.01,3064.71 3187.96,3068.11 3188.22,3069.9
  region net X6: 3293.23,3098.83 3291.74,3101.58 3293.02,3102.99 3294.1,3104.43 3295.82,3107.46 3297.21,3110.71 3298.59,3114.21 3306.11,3104.82 3302.77,3104.01 3299.23,3102.68 3295.91,3100.92 3294.47,3099.91
  region net X7: 3251.47,3136.48 3248.47,3136.48 3248.37,3138.23 3248.09,3140.01 3247.06,3143.59 3245.62,3147.05 3243.96,3150.26 3255.99,3150.26 3254.33,3147.05 3252.88,3143.59 3251.86,3140.01 3251.57,3138.23
  region net X7: 3248.47,3170.76 3251.47,3170.76 3251.57,3169.01 3251.86,3167.23 3252.88,3163.65 3254.33,3160.19 3255.99,3156.98 3243.96,3156.98 3245.62,3160.19 3247.06,3163.65 3248.09,3167.23 3248.37,3169.01
  region net X6: 3263.07,3158.63 3266.07,3158.63 3266.17,3156.88 3266.46,3155.1 3267.48,3151.52 3268.93,3148.06 3270.59,3144.85 3258.56,3144.85 3260.22,3148.06 3261.66,3151.52 3262.69,3155.1 3262.97,3156.88
  region net X6: 3266.07,3248.92 3263.07,3248.57 3262.97,3250.3 3262.68,3252.08 3261.63,3255.7 3260.15,3259.21 3258.46,3262.35 3270.48,3262.7 3268.86,3259.44 3267.45,3256.02 3266.45,3252.49 3266.17,3250.71
  region net Y1: 3046.52,3086.67 3046.52,3083.67 3044.76,3083.57 3042.98,3083.28 3039.41,3082.26 3035.94,3080.81 3032.74,3079.16 3032.74,3091.18 3035.94,3089.53 3039.41,3088.08 3042.98,3087.06 3044.76,3086.77
  region net Y1: 3315.41,3083.69 3315.45,3086.69 3317.21,3086.79 3318.99,3087.08 3322.56,3088.1 3326.02,3089.54 3329.23,3091.19 3329.19,3079.17 3325.99,3080.83 3322.53,3082.28 3318.95,3083.3 3317.16,3083.59
  region net Y1: 3099.07,3258.77 3096.07,3258.77 3095.93,3259.51 3095.53,3260.05 3094.94,3260.44 3094.24,3260.76 3092.74,3261.41 3092.08,3261.88 3091.56,3262.53 3103.59,3262.53 3103.07,3261.88 3102.41,3261.41 3100.91,3260.76 3100.2,3260.44 3099.62,3260.05 3099.22,3259.51
  region net Y1: 3094.67,3039.39 cw(c3085.67,3039.39) 3085.67,3030.39 3086.55,3027.39 cw(c3086.55,3005.66) 3101.92,3021.03 3104.04,3023.15 cw(c3119.4,3038.51) 3097.67,3038.51
  region net X4: 3173.05,3108.86 cw(c3175.45,3111.01) 3173.17,3113.28 3171.05,3115.41 cw(c3159.15,3138.39) 3159.15,3112.51 3159.15,3109.51 cw(c3159.15,3083.14) 3170.93,3106.73
  region net Y3: 3234.87,3154.3 3236.99,3152.18 ccw(c3246.18,3142.99) 3234.16,3147.94 3230.62,3151.47 ccw(c3225.67,3163.5)
  region net X6: 3225.52,3053.44 3222.52,3051.67 ccw(c3175.71,3051.67) 3222.26,3056.67 3226.52,3058.44 ccw(c3238.52,3053.44)
  region net X4: 3168.93,3108.58 3170.93,3106.73 3173.05,3108.86 cw(c3175.45,3111.01) 3173.17,3113.28 3171.05,3115.41 3168.97,3113.51
  region net Y2: 3231.91,3168.55 3234.03,3166.43 ccw(c3238.81,3161.65) 3232.24,3163.22 3228.7,3166.76 ccw(c3227.14,3173.33)
  region net Y1: 3189.94,3185.87 3189.94,3188.87 ccw(c3189.94,3962.12) 3194.06,3188.88 3192.02,3184.93 ccw(c3189.94,3183.08)
  region net X8: 3239.07,3049.18 3236.07,3049.18 ccw(c3223.07,3049.18) 3235.07,3054.18 3240.07,3054.18 ccw(c3252.07,3049.18)